# Altium PCB PCB.PcbDoc (part 1 of 2)
Units mm, origin at the board's own origin, x right, y up, seen from the top; angles counter-clockwise.
Board outline 21 x 43 mm, 2 copper layers (Top Layer, Bottom Layer), stack 1.671 mm thick; 34 components, 43 nets, 166 pads, 90 vias.
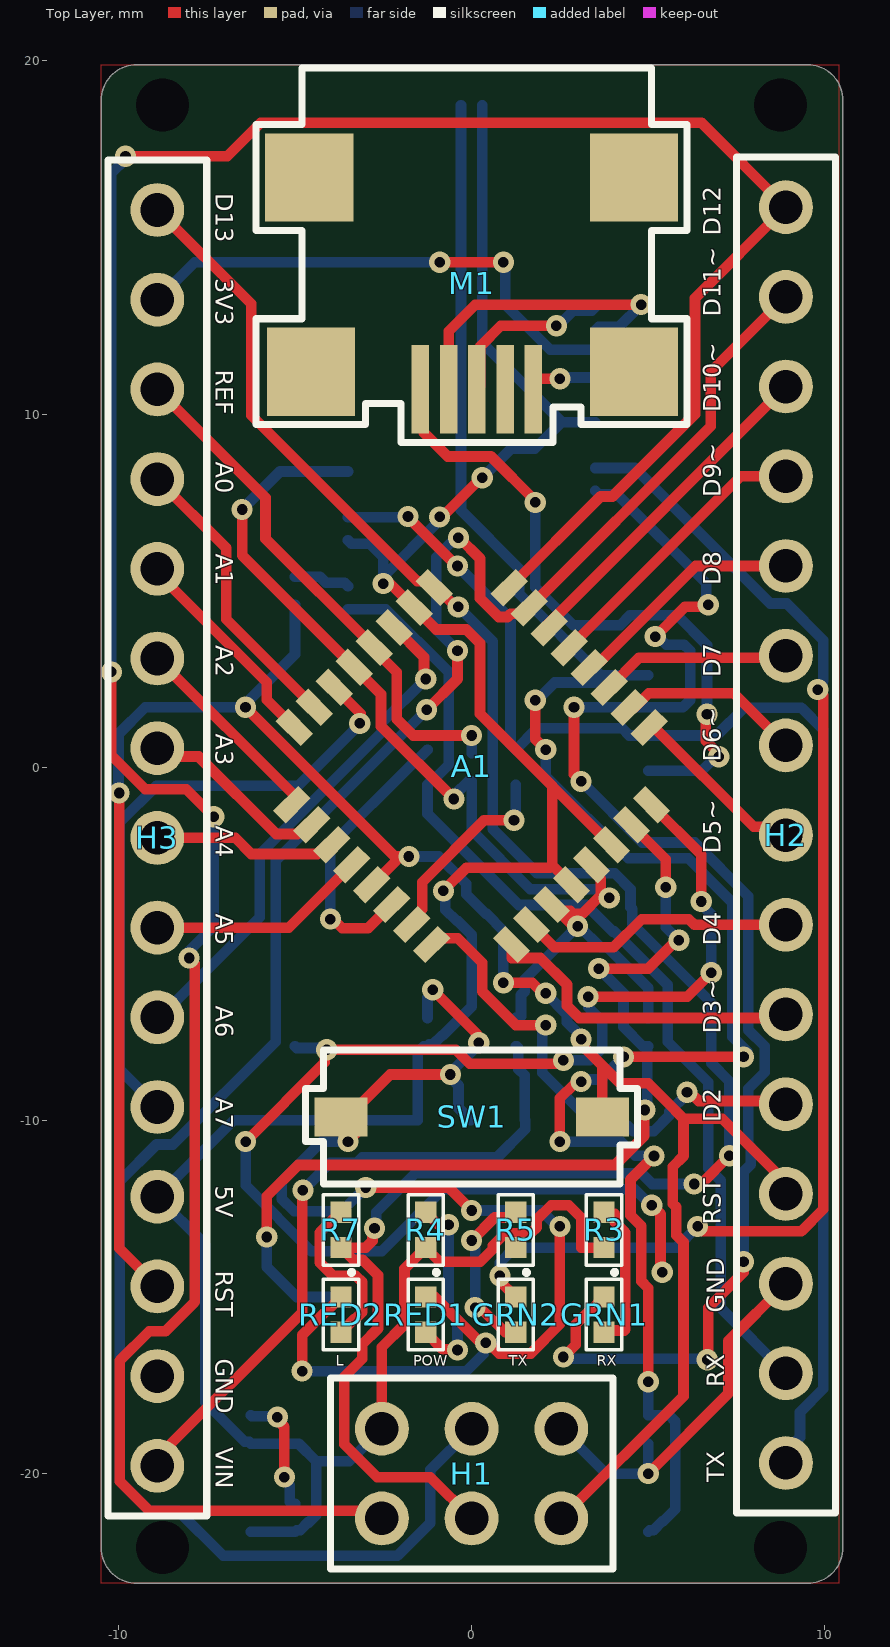
[diagram p0: Top Layer view]
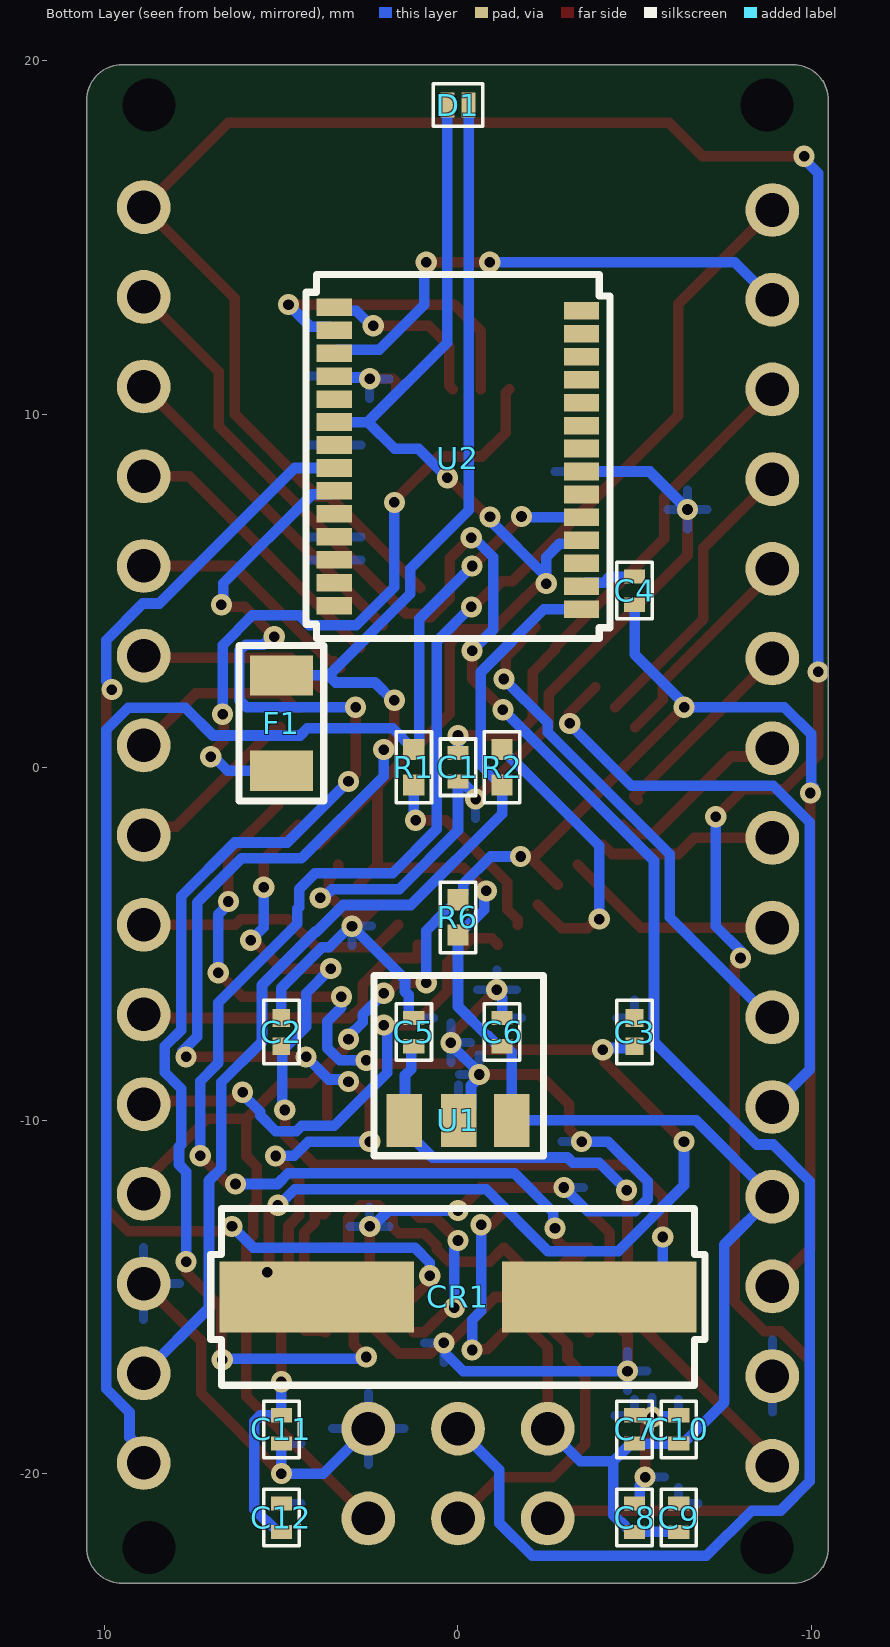
[diagram p1: Bottom Layer view, seen from below]
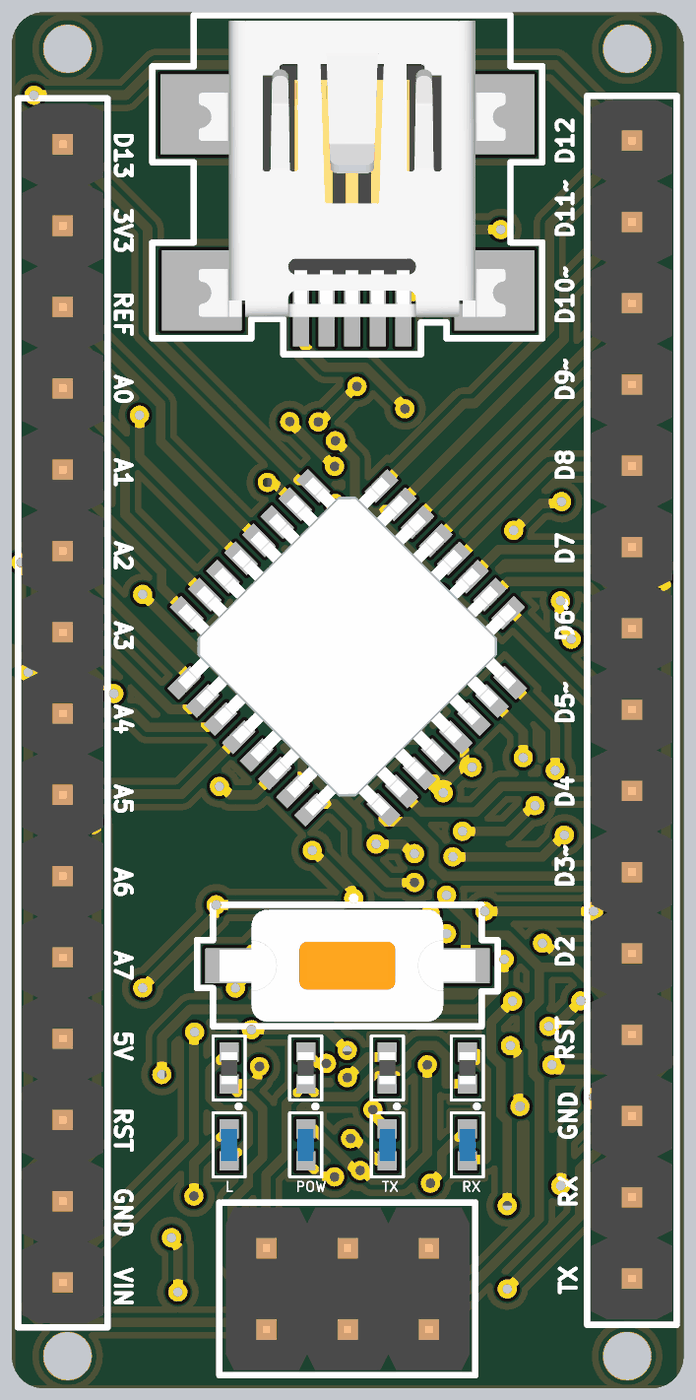
[diagram p2: 3D render of the assembled board from above, using the file's embedded part models]
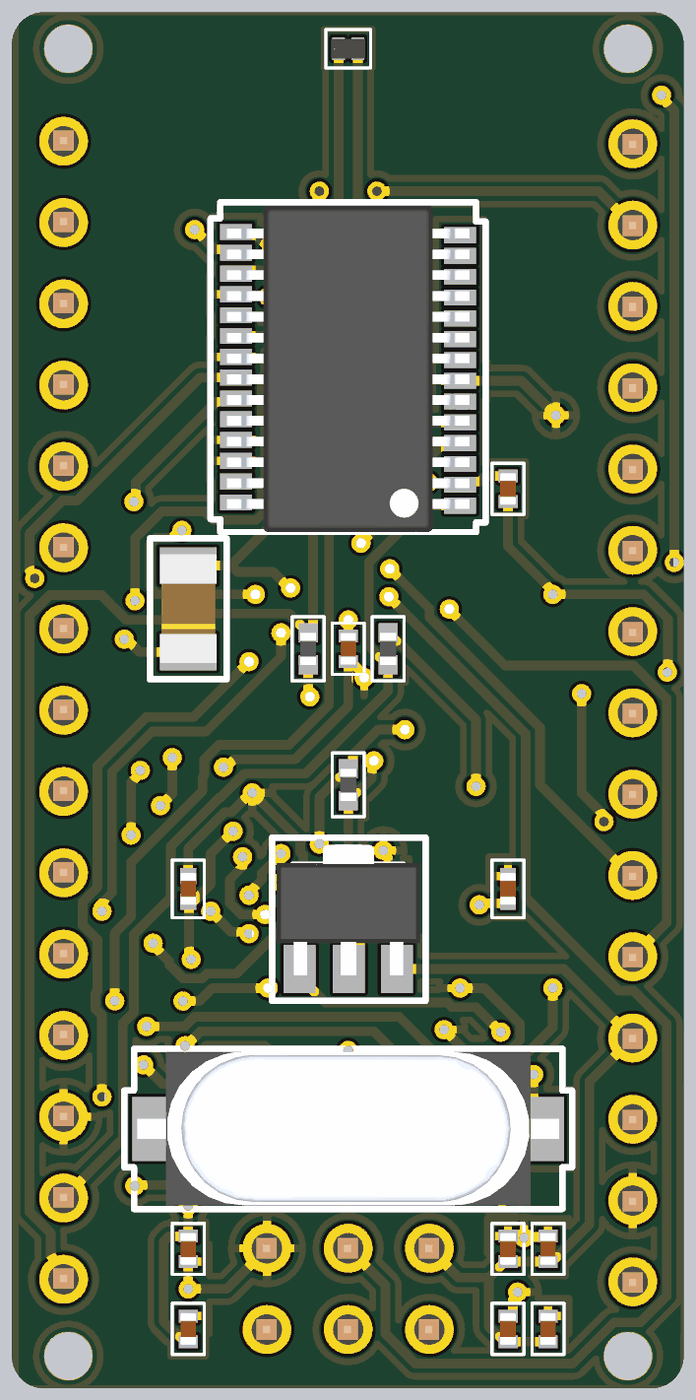
[diagram p3: 3D render of the assembled board from below, using the file's embedded part models]

## Layer stack, top to bottom
Top Solder: solder mask 0.0102, Solder Resist, Dk 3.5
Top Layer: signal copper 0.0356
Dielectric 1: dielectric 1.6, FR-4, Dk 4.8
Bottom Layer: signal copper 0.0356
Bottom Solder: solder mask 0.0102, Solder Resist, Dk 3.5

## Board outline
-10.487,-22.107 -10.487,18.893 cw(c-9.487,18.893) -9.487,19.893 9.513,19.893 cw(c9.513,18.893) 10.513,18.893 10.513,-22.107 cw(c9.513,-22.107) 9.513,-23.107 -9.487,-23.107 cw(c-9.487,-22.107)

## Design rules (kind name [scope] priority, off if disabled: settings)
Clearance [All] p1: gap=0.15 ignorepadtopadclearanceinfootprint=FALSE
HoleSize [All] p1: absolutevalues=TRUE maxlimit=2.54 minlimit=0 maxpercent=80.000 minpercent=20.000
HoleToHoleClearance [All] p1: gap=0.01 allowstackedmicrovias=TRUE
MinimumSolderMaskSliver [All] p1: minsoldermaskwidth=0.01
PolygonConnect [All] p1: connectstyle=Relief reliefconductorwidth=0.254 reliefentries=4 polygonreliefangle="90 Angle" airgapwidth=0.254
RoutingVias [All] p1: holewidth=0.3 width=0.6 viastyle="Through Hole" minholewidth=0.3 minwidth=0.6 maxholewidth=0.3 maxwidth=0.6
SilkToSilkClearance [All] p1: silktosilkclearance=0.01
SilkToSolderMaskClearance [IsPad] p1: minsilkscreentomaskgap=0 clearancetoexposedcopper=TRUE
SolderMaskExpansion [All] p1: expansion=0.102 istentingtop=FALSE
Width [All] p1: maxlimit=0.4 minlimit=0.2 preferedwidth=0.3
25 further rules are at their usual default settings.

## Components (designator, comment, footprint, x,y, rotation, side; value= is the part's Value field where it differs from the comment)
A1 "ATMega 328P" "ATMEGA 328P" 0,0 r135 top
C1 "0.1uF" "0.1UF CAPACITOR" 0,0 r270 bottom
C2 "22pF" 22PF 5,-7.5 r270 bottom
C3 "22pF" 22PF -5,-7.5 r90 bottom
C4 "0.1uF" "0.1UF CAPACITOR" -5,5 r90 bottom
C5 "0.33uF" "0.33UF CAPACITOR" 1.25,-7.5 r270 bottom
C6 "0.1uF" "0.1UF CAPACITOR" -1.25,-7.5 r270 bottom
C7 "0.1uF" "0.1UF CAPACITOR" -5,-18.75 r90 bottom
C8 "1uF" "1UF CAPACITOR" -5,-21.25 r270 bottom
C9 "4.7uF" "4.7UF CAPACITOR" -6.25,-21.25 r270 bottom
C10 "1uF" "1UF CAPACITOR" -6.25,-18.75 r270 bottom
C11 "4.7uF" "4.7UF CAPACITOR" 5,-18.75 r90 bottom
C12 "0.1uF" "0.1UF CAPACITOR" 5,-21.25 r270 bottom
CR1 "16MHz Crystal" "16MHZ CRYSTAL" 0,-15 r0 bottom
D1 "Diode" DIODE 0,18.75 r180 bottom
F1 "500mA" FUSE 5,1.25 r90 bottom
GRN1 "GREEN LED" "GREEN LED" 3.75,-15.5 r270 top
GRN2 "GREEN LED" "GREEN LED" 1.25,-15.5 r270 top
H1 "3x3" "3X3 HEADER" 0,-20 r90 top
H2 "15x1" "15X1 HEADER" 8.9,-1.92 r180 top
H3 "15x1" "15X1 HEADER" -8.9,-2 r0 top
M1 "Mini USB" "MINI USB" 0,13.7 r0 top
R1 "1K" "1K RESISTOR" 1.25,0 r90 bottom
R2 "1K" "1K RESISTOR" -1.25,0 r90 bottom
R3 "1K" "1K RESISTOR" 3.75,-13.1 r270 top
R4 "1K" "1K RESISTOR" -1.3,-13.1 r270 top
R5 "1K" "1K RESISTOR" 1.25,-13.1 r90 top
R6 "1K" "1K RESISTOR" 0,-4.25 r270 bottom
R7 "1K" "1K RESISTOR" -3.7,-13.1 r270 top
RED1 "RED LED" "RED LED" -1.3,-15.5 r270 top
RED2 "RED LED" "RED LED" -3.7,-15.5 r270 top
SW1 "Push Button" "PUSH BUTTON" 0,-9.9 r0 top
U1 "5V Voltage Regulator" "VOLTAGE REGULATOR" 0,-10 r180 bottom
U2 "FT232RL-REEL" FTDI 0,8.75 r0 bottom

## Footprints (in the part's own frame and the unit in brackets; to place one, negate y for a bottom-side part, rotate by r counter-clockwise, add the part's x,y. Pads: shape width x height; smd on the part's side, far side on the other; paste and mask are expansions set on the pad)
"0.1UF CAPACITOR" [mm]
  rect 0.4x0.6 smd: 1(-0.4,0) 2(0.4,0)
  silkscreen extent -0.8,-0.5 0.8,0.5, body extent -0.5,-0.25 0.5,0.25, height 0.55
"0.33UF CAPACITOR" [mm]
  rect 0.4x0.6 smd: 1(-0.4,0) 2(0.4,0)
  silkscreen extent -0.8,-0.5 0.8,0.5, body extent -0.5,-0.25 0.5,0.25, height 0.55
"1K RESISTOR" [mm]
  rect 0.6x0.6 smd: 1(-0.5,0) 2(0.5,0)
  silkscreen extent -1,-0.5 1,0.5, body extent -0.5,-0.25 0.5,0.25, height 0.36
"1UF CAPACITOR" [mm]
  rect 0.4x0.6 smd: 1(-0.4,0) 2(0.4,0)
  silkscreen extent -0.8,-0.5 0.8,0.5, body extent -0.5,-0.25 0.5,0.25, height 0.55
"3X3 HEADER" [mil]
  round 60 hole 37.4: 1(-50,100) 2(50,100) 3(-50,0) 4(50,0) 5(-50,-100) 6(50,-100)
  silkscreen extent -106,-157 106,157, body extent -100,-150 100,150, height 219
"4.7UF CAPACITOR" [mm]
  rect 0.4x0.6 smd: 1(-0.4,0) 2(0.4,0)
  silkscreen extent -0.8,-0.5 0.8,0.5, body extent -0.5,-0.25 0.5,0.25, height 0.55
"15X1 HEADER" [mil]
  round 60 hole 37.4: 1(0,700) 2(0,600) 3(0,500) 4(0,400) 5(0,300) 6(0,200) 7(0,100) 8(0,0) 9(0,-100) 10(0,-200) 11(0,-300) 12(0,-400) 13(0,-500) 14(0,-600) 15(0,-700)
  silkscreen extent -55,-756 55,756, body extent -50,-751 50,749, height 219
"16MHZ CRYSTAL" [mm]
  rect 5.5x2 smd: 1(-4,0) 2(4,0)
  silkscreen extent -7,-2.5 7,2.5, body extent -6.6,-2.41 6.6,2.39, height 4.31
22PF [mm]
  rect 0.5x0.5 smd: 1(-0.4,0) 2(0.4,0)
  silkscreen extent -0.9,-0.5 0.9,0.5, body extent -0.5,-0.25 0.5,0.25, height 0.56
"ATMEGA 328P" [mm]
  rect 1x0.5 smd: 1(-4.35,2.75) 2(-4.35,1.95) 3(-4.35,1.15) 4(-4.35,0.35) 5(-4.35,-0.45) 6(-4.35,-1.25) 7(-4.35,-2.05) 8(-4.35,-2.85) 17(4.35,-2.85) 18(4.35,-2.05) 19(4.35,-1.25) 20(4.35,-0.45) 21(4.35,0.35) 22(4.35,1.15) 23(4.35,1.95) 24(4.35,2.75)
  rect 0.5x1 smd: 9(-2.76,-4.35) 10(-1.96,-4.35) 11(-1.16,-4.35) 12(-0.36,-4.35) 13(0.44,-4.35) 14(1.24,-4.35) 15(2.04,-4.35) 16(2.84,-4.35) 25(2.85,4.35) 26(2.05,4.35) 27(1.25,4.35) 28(0.45,4.35) 29(-0.35,4.35) 30(-1.15,4.35) 31(-1.95,4.35) 32(-2.75,4.35)
  body extent -4.45,-4.55 4.55,4.45, height 1.06
DIODE [mm]
  rect 0.4x0.7 smd: 1(-0.3,0) 2(0.3,0)
  silkscreen extent -0.7,-0.6 0.7,0.6, body extent -0.53,-0.31 0.53,0.3, height 0.54
FTDI [mm]
  rect 1x0.5 smd: 1(-3.5,4.275) 2(-3.5,3.625) 3(-3.5,2.975) 4(-3.5,2.325) 5(-3.5,1.675) 6(-3.5,1.025) 7(-3.5,0.375) 8(-3.5,-0.275) 9(-3.5,-0.925) 10(-3.5,-1.575) 11(-3.5,-2.225) 12(-3.5,-2.875) 13(-3.5,-3.525) 14(-3.5,-4.175) 15(3.5,-4.275) 16(3.5,-3.625) 17(3.5,-2.975) 18(3.5,-2.325) 19(3.5,-1.675) 20(3.5,-1.025) 21(3.5,-0.375) 22(3.5,0.275) 23(3.5,0.925) 24(3.5,1.575) 25(3.5,2.225) 26(3.5,2.875) 27(3.5,3.525) 28(3.5,4.175)
  silkscreen extent -4.3,-5.2 4.3,5.1, body extent -3.9,-5.1 3.9,5.1, height 1.86
FUSE [mm]
  rect 1.14x1.78 smd: 1(-1.35,0) 2(1.35,0)
  silkscreen extent -2.2,-1.2 2.2,1.2, body extent -1.7,-0.89 1.7,0.89, height 0.79
"GREEN LED" [mm]
  rect 0.6x0.6 smd: 1(-0.5,0) 2(0.5,0)
  silkscreen extent -1.2,-0.5 1,0.5, body extent -0.5,-0.25 0.5,0.25, height 0.41
"MINI USB" [mm]
  rect 0.5x2.5 smd: 1(-1.45,-3) 2(-0.65,-3) 3(0.15,-3) 4(0.95,-3) 5(1.75,-3)
  rect 2.5x2.5 smd: 6(-4.6,3) 6(-4.55,-2.5) 7(4.6,-2.5) 8(4.6,3)
  silkscreen extent -6.1,-4.5 6.1,6.1, body extent -4.65,-3.32 4.95,5.92, height 3.91
"PUSH BUTTON" [mm]
  rect 1.5x1.1 smd: 1(-3.7,0) 2(3.7,0)
  silkscreen extent -4.7,-1.9 4.7,1.9, body extent -4,-1.75 4,1.75, height 4.16
"RED LED" [mm]
  rect 0.6x0.6 smd: 1(-0.5,0) 2(0.5,0)
  silkscreen extent -1.2,-0.5 1,0.5, body extent -0.5,-0.25 0.5,0.25, height 0.41
"VOLTAGE REGULATOR" [mm]
  rect 1x1.5 smd: 1(-1.52,0) 2(0.02,0) 3(1.52,0)
  silkscreen extent -2.38,-1 2.42,4.1, body extent -2.24,-0.2 2.26,3.9, height 1.61

## Part data
A1: library part ATMEGA328P-AUR, "ATMEL         ATMEGA328P-AUR             8 Bit Microcontroller, Low Power High Performance, ATmega, 20 MHz, 32 KB, 2 KB, 32 Pins, TQFP", Case/Package=A, Frequency=20MHz, Manufacturer="Microchip / Atmel", Max Operating Temperature=85°C, Max Supply Voltage=5.5V, Min Operating Temperature=-40°C, Min Supply Voltage=1.8V, Package Quantity=2000, Supplier Part Number 1=ATMEGA328P-AURCT-ND, Category=Microcontrollers, ComponentLink1Description=https://datasheet.ciiva.com/6641/atmega48a-pa-88a-pa-168a-pa-328-p-ds-ds40002061a-6641009.pdf?src-supplier=Digi-Key, ComponentLink1URL=https://datasheet.ciiva.com/6641/atmega48a-pa-88a-pa-168a-pa-328-p-ds-ds40002061a-6641009.pdf?src-supplier=Digi-Key, Contact Plating=Tin,Matte, Core Architecture=AVR, Data Bus Width=8b, Interface=I2C,SPI,UART,USART, Lead Free="Lead Free", Manufacturer Part Number=ATMEGA328P-AUR, Max Frequency=20MHz, Memory Size=32KB, Memory Type=FLASH, Mount="Surface Mount", Number of I/Os=23, Number of Pins=32, Number of Programmable I/O=23, Number of Timers/Counters=3, Oscillator Type=Internal, Packaging="Tape and Reel", Peripherals="Brown-out Detect/Reset,POR,PWM,WDT", Pricing 1="1=2.08000, 25=1.91000, 100=1.73000 (USD)", RAM Size=2KB, REACH SVHC="No SVHC", RoHS=Yes, Stock 1=15541, Supplier 1=Digi-Key, Watchdog Timer=Yes
C1 C4 C6 C7 C12: library part EMK105BJ104KV-F, "TAIYO YUDEN - EMK105BJ104KV-F - CERAMIC CAPACITOR, 0.1UF, 16V, X5R, 10%, 0402, FULL REEL", Capacitance=100nF, Case Code (Imperial)=0402, Case Code (Metric)=1005, Dielectric=X5R, Manufacturer="Taiyo Yuden", Max Operating Temperature=85°C, Min Operating Temperature=-55°C, Package Quantity=1, Resistor Type=Ceramic, Supplier Part Number 1=587-1226-1-ND, Tolerance=10%, Voltage Rating=16V, Case/Package=0402, Category="Ceramic Capacitors", ComponentLink1Description=https://datasheet.ciiva.com/30156/744emk105bj104kv-f-30156673.pdf?src-supplier=Onlinecomponents.com, ComponentLink1URL=https://datasheet.ciiva.com/30156/744emk105bj104kv-f-30156673.pdf?src-supplier=Onlinecomponents.com, ComponentLink2Description=https://datasheet.ciiva.com/30119/255emk105bj104kv-f-30119734.pdf?src-supplier=Onlinecomponents.com, ComponentLink2URL=https://datasheet.ciiva.com/30119/255emk105bj104kv-f-30119734.pdf?src-supplier=Onlinecomponents.com, ComponentLink3Description=https://datasheet.ciiva.com/129/emk105bj104kv-f-ss-129786.pdf?src-supplier=Digi-Key, ComponentLink3URL=https://datasheet.ciiva.com/129/emk105bj104kv-f-ss-129786.pdf?src-supplier=Digi-Key, ComponentLink4Description=https://datasheet.ciiva.com/15920/1135emk105bj104kv-f-15920444.pdf?src-supplier=Onlinecomponents.com, ComponentLink4URL=https://datasheet.ciiva.com/15920/1135emk105bj104kv-f-15920444.pdf?src-supplier=Onlinecomponents.com, ComponentLink5Description=https://datasheet.ciiva.com/5443/mlcc-all-e-541559-5443819.pdf?src-supplier=Mouser, ComponentLink5URL=https://datasheet.ciiva.com/5443/mlcc-all-e-541559-5443819.pdf?src-supplier=Mouser, Contact Plating=Tin, Depth=0.5mm, Halogen Free="Halogen Free", Height=0.5mm, Lead Free="Lead Free", Length=1mm, Manufacturer Part Number=EMK105BJ104KV-F, Mount="Surface Mount", Number of Pins=2, Packaging="Tape and Reel", Pricing 1="1=0.10000, 10=0.02100, 50=0.01120, 100=0.00920, 500=0.00654, 1000=0.00514, 2500=0.00468, 5000=0.00430 (USD)", Radiation Hardening=No, REACH SVHC=Unknown, RoHS=Yes, Stock 1=2015960, Supplier 1=Digi-Key, Termination=SMD/SMT, Thickness=0.022inch, Voltage Rating (DC)=16V, Width=0.02inch
C2 C3: library part 04025A220FAT2A, "Cap Ceramic 22pF 50V C0G 1% SMD 0402 125C Paper T/R", Case Code (Imperial)=0402, Case Code (Metric)=1005, Dielectric=C0G, Manufacturer="Kyocera AVX", Max Operating Temperature=125°C, Min Operating Temperature=-55°C, Package Quantity=1, Supplier Part Number 1=478-5765-1-ND, Tolerance=1%, Voltage Rating=50V, Capacitance=22pF, Case/Package=0402, Category="Ceramic Capacitors", ComponentLink1Description=https://datasheet.ciiva.com/153/ccog-153298.pdf?src-supplier=Digi-Key, ComponentLink1URL=https://datasheet.ciiva.com/153/ccog-153298.pdf?src-supplier=Digi-Key, ComponentLink2Description=https://datasheet.ciiva.com/153/ccog-153299.pdf?src-supplier=Digi-Key, ComponentLink2URL=https://datasheet.ciiva.com/153/ccog-153299.pdf?src-supplier=Digi-Key, ComponentLink3Description=https://datasheet.ciiva.com/153/ccog-153300.pdf?src-supplier=Digi-Key, ComponentLink3URL=https://datasheet.ciiva.com/153/ccog-153300.pdf?src-supplier=Digi-Key, ComponentLink4Description=https://datasheet.ciiva.com/11530/ccog-11530021.pdf?src-supplier=Avnet, ComponentLink4URL=https://datasheet.ciiva.com/11530/ccog-11530021.pdf?src-supplier=Avnet, ComponentLink5Description=https://datasheet.ciiva.com/5419/ccog-243403-5419529.pdf?src-supplier=Mouser, ComponentLink5URL=https://datasheet.ciiva.com/5419/ccog-243403-5419529.pdf?src-supplier=Mouser, Contact Plating=Tin,Matte, Depth=0.5mm, Height=0.56mm, Lead Free="Lead Free", Length=1mm, Manufacturer Part Number=04025A220FAT2A, Mount="Surface Mount", Packaging="Tape and Reel", Pricing 1="1=0.51000, 10=0.36100, 50=0.27280, 100=0.23760, 500=0.17600, 1000=0.14960, 2500=0.14080, 5000=0.13200 (USD)", Radiation Hardening=No, REACH SVHC=Unknown, RoHS=Yes, Stock 1=43003, Supplier 1=Digi-Key, Termination=SMD/SMT, Thickness=0.022inch, Voltage Rating (DC)=50V, Width=0.02inch
C5: library part CGA2B1X7S1C334K050BC, "Automotive Grade", Capacitance=330nF, Case Code (Imperial)=0402, Case Code (Metric)=1005, Dielectric=X7S, Manufacturer=TDK, Max Operating Temperature=125°C, Min Operating Temperature=-55°C, Package Quantity=10000, Ratings=AEC-Q200, Supplier Part Number 1=445-180203-1-ND, Tolerance=10%, Voltage Rating=16V, Case/Package=0402, Category="Ceramic Capacitors", ComponentLink1Description=https://product.tdk.com/info/en/catalog/datasheets/mlcc_automotive_general_en.pdf?src-supplier=Digi-Key, ComponentLink1URL=https://product.tdk.com/info/en/catalog/datasheets/mlcc_automotive_general_en.pdf?src-supplier=Digi-Key, ComponentLink2Description=https://product.tdk.com/info/en/catalog/spec/mlccspec_automotive_general_midvoltage_en.pdf?src-supplier=Digi-Key, ComponentLink2URL=https://product.tdk.com/info/en/catalog/spec/mlccspec_automotive_general_midvoltage_en.pdf?src-supplier=Digi-Key, ComponentLink3Description=http://product.tdk.com/capacitor/mlcc/class/print_detail_pdf.php?lang=en&part_no=CGA2B1X7S1C334K050BC&src-supplier=Avnet, ComponentLink3URL=http://product.tdk.com/capacitor/mlcc/class/print_detail_pdf.php?lang=en&part_no=CGA2B1X7S1C334K050BC&src-supplier=Avnet, ComponentLink4Description=http://product.tdk.com/capacitor/mlcc/detailed_information.php?lang=en&ref=jp&part_no=CGA2B1X7S1C334K050BC&src-supplier=Mouser, ComponentLink4URL=http://product.tdk.com/capacitor/mlcc/detailed_information.php?lang=en&ref=jp&part_no=CGA2B1X7S1C334K050BC&src-supplier=Mouser, Height=0.5mm, Length=0.039inch, Manufacturer Part Number=CGA2B1X7S1C334K050BC, Mount="Surface Mount", Packaging="Tape and Reel", Pricing 1="1=0.23000, 10=0.15800, 50=0.09460, 100=0.07980, 500=0.05460, 1000=0.04830, 2500=0.04620, 5000=0.04200 (USD)", RoHS=Yes, Stock 1=26015, Supplier 1=Digi-Key, Termination=SMD/SMT, Thickness=0.022inch, Voltage Rating (DC)=16V, Weight=2.3E-05oz, Width=0.02inch
C8 C10: library part LMK105BJ105KV-F, "LMK105BJ105KV-F", Case Code (Imperial)=0402, Case Code (Metric)=1005, Dielectric=X5R, Manufacturer="Taiyo Yuden", Max Operating Temperature=85°C, Min Operating Temperature=-55°C, Package Quantity=1, Resistor Type=Ceramic, Supplier Part Number 1=587-1454-1-ND, Tolerance=10%, Voltage Rating=10V, Capacitance=1uF, Case/Package=0402, Category="Ceramic Capacitors", ComponentLink1Description=https://datasheet.ciiva.com/26872/getdatasheetpartid-637441-26872608.pdf?src-supplier=Verical, ComponentLink1URL=https://datasheet.ciiva.com/26872/getdatasheetpartid-637441-26872608.pdf?src-supplier=Verical, ComponentLink2Description=https://datasheet.ciiva.com/15921/463lmk105bj105kv-f-15921218.pdf?src-supplier=Onlinecomponents.com, ComponentLink2URL=https://datasheet.ciiva.com/15921/463lmk105bj105kv-f-15921218.pdf?src-supplier=Onlinecomponents.com, ComponentLink3Description=https://datasheet.ciiva.com/131/lmk105bj105kv-f-ss-131735.pdf?src-supplier=Digi-Key, ComponentLink3URL=https://datasheet.ciiva.com/131/lmk105bj105kv-f-ss-131735.pdf?src-supplier=Digi-Key, ComponentLink4Description=https://datasheet.ciiva.com/30256/308lmk105bj105kv-f-30256903.pdf?src-supplier=Onlinecomponents.com, ComponentLink4URL=https://datasheet.ciiva.com/30256/308lmk105bj105kv-f-30256903.pdf?src-supplier=Onlinecomponents.com, Depth=0.5mm, Halogen Free="Halogen Free", Height=0.5mm, Lead Free="Lead Free", Length=1mm, Manufacturer Part Number=LMK105BJ105KV-F, Mount="Surface Mount", Packaging="Tape and Reel", Pricing 1="1=0.11000, 10=0.07900, 50=0.04300, 100=0.03500, 500=0.02502, 1000=0.01966, 2500=0.01788, 5000=0.01645 (USD)", Radiation Hardening=No, REACH SVHC=Unknown, RoHS=Yes, Stock 1=3118229, Supplier 1=Digi-Key, Termination=SMD/SMT, Thickness=0.022inch, Voltage Rating (DC)=10V, Width=0.5mm
C9 C11: library part JMK105BBJ475MVHF, "CAP CER 4.7UF 6.3V X5R 0402", Case Code (Imperial)=0402, Case Code (Metric)=1005, Dielectric=X5R, Manufacturer="Taiyo Yuden", Max Operating Temperature=85°C, Min Operating Temperature=-55°C, Package Quantity=10000, Ratings=AEC-Q200, Supplier Part Number 1=587-3711-1-ND, Tolerance=20%, Voltage Rating=6.3V, Capacitance=4.7uF, Case/Package=0402, Category="Ceramic Capacitors", ComponentLink1Description=http://www.farnell.com/datasheets/2819875.pdf?src-supplier=Farnell, ComponentLink1URL=http://www.farnell.com/datasheets/2819875.pdf?src-supplier=Farnell, ComponentLink2Description=http://www.mouser.com/ds/2/396/mlcc11_hq_e-541564.pdf?src-supplier=Mouser, ComponentLink2URL=http://www.mouser.com/ds/2/396/mlcc11_hq_e-541564.pdf?src-supplier=Mouser, ComponentLink3Description=http://www.yuden.co.jp/ut/product/category/capacitor/putpdf/JMK105BBJ475MVHF_SS.pdf?src-supplier=Avnet, ComponentLink3URL=http://www.yuden.co.jp/ut/product/category/capacitor/putpdf/JMK105BBJ475MVHF_SS.pdf?src-supplier=Avnet, ComponentLink4Description=http://www.farnell.com/datasheets/2819875.pdf?src-supplier=Newark, ComponentLink4URL=http://www.farnell.com/datasheets/2819875.pdf?src-supplier=Newark, ComponentLink5Description=http://www.farnell.com/datasheets/2819875.pdf?src-supplier=Element14, ComponentLink5URL=http://www.farnell.com/datasheets/2819875.pdf?src-supplier=Element14, ComponentLink6Description=http://www.yuden.co.jp/productdata/catalog/en/mlcc_all_e.pdf?src-supplier=Avnet+Asia, ComponentLink6URL=http://www.yuden.co.jp/productdata/catalog/en/mlcc_all_e.pdf?src-supplier=Avnet+Asia, ComponentLink7Description=http://www.yuden.co.jp/productdata/catalog/en/mlcc_all_hq_e.pdf?src-supplier=Digi-Key, ComponentLink7URL=http://www.yuden.co.jp/productdata/catalog/en/mlcc_all_hq_e.pdf?src-supplier=Digi-Key, ComponentLink8Description=http://ds.yuden.co.jp/TYCOMPAS/ut/detail.do?productNo=JMK105BBJ475MVHF&fileName=JMK105BBJ475MVHF_SS&mode=specSheetDownload&src-supplier=Digi-Key, ComponentLink8URL=http://ds.yuden.co.jp/TYCOMPAS/ut/detail.do?productNo=JMK105BBJ475MVHF&fileName=JMK105BBJ475MVHF_SS&mode=specSheetDownload&src-supplier=Digi-Key, Contact Plating=Tin, Halogen Free="Halogen Free", Height=0.5mm, Lead Free="Lead Free", Length=1mm, Manufacturer Part Number=JMK105BBJ475MVHF, Mount="Surface Mount", Packaging="Tape and Reel", Pricing 1="1=0.18000, 10=0.12700, 50=0.07220, 100=0.05980, 500=0.04194, 1000=0.03472, 2500=0.03231, 5000=0.02956 (USD)", RoHS=Yes, Stock 1=77436, Supplier 1=Digi-Key, Termination=SMD/SMT, Thickness=0.026inch, Voltage Rating (DC)=6.3V, Weight=2.3E-05oz, Width=0.5mm
CR1: library part ECS-160-20-5PX-TR, "CRYSTAL 16.0000MHZ 20PF SMD", ESR (Equivalent Series Resistance)=40R, Frequency=16MHz, Frequency Stability=50ppm, Frequency Tolerance=30ppm, Load Capacitance=20pF, Manufacturer="ECS International", Max Operating Temperature=70°C, Min Operating Temperature=-10°C, Package Quantity=1000, Supplier Part Number 1=XC1282CT-ND, Category=Crystals, ComponentLink1Description=https://datasheet.ciiva.com/852/csm-7x-852386.pdf?src-supplier=Digi-Key, ComponentLink1URL=https://datasheet.ciiva.com/852/csm-7x-852386.pdf?src-supplier=Digi-Key, ComponentLink2Description=https://datasheet.ciiva.com/852/csm-7x-852388.pdf?src-supplier=Digi-Key, ComponentLink2URL=https://datasheet.ciiva.com/852/csm-7x-852388.pdf?src-supplier=Digi-Key, ComponentLink3Description=https://datasheet.ciiva.com/852/csm-7x-852387.pdf?src-supplier=Digi-Key, ComponentLink3URL=https://datasheet.ciiva.com/852/csm-7x-852387.pdf?src-supplier=Digi-Key, Height=0.169inch, Lead Free="Lead Free", Length=0.449inch, Manufacturer Part Number=ECS-160-20-5PX-TR, Mount="Surface Mount", Number of Pins=2, Packaging="Tape and Reel", Pricing 1="1=0.45000, 10=0.37500, 50=0.33760, 100=0.30000, 500=0.28500 (USD)", RoHS=Yes, Stock 1=15488, Supplier 1=Digi-Key, Termination=SMD/SMT, Tolerance=30ppm, Width=0.189inch
D1: library part BAT54LP-7, "MULTICOMP PRO - BAT54LP-7 - DIODE, ULTRAFAST RECOVERY, 100mA, 30V, DFN1006", Average Rectified Current=200mA, Capacitance=10pF, Case/Package=DFN, Forward Voltage=1V, Manufacturer=Diodes, Max Forward Surge Current (Ifsm)=600mA, Max Operating Temperature=125°C, Max Repetitive Reverse Voltage (Vrrm)=30V, Max Reverse Current=2uA, Min Operating Temperature=-65°C, Package Quantity=3000, Power Dissipation=250mW, Supplier Part Number 1=BAT54LPDICT-ND, Category="Schottky Diodes", ComponentLink1Description=https://datasheet.ciiva.com/16210/ds30504-16210561.pdf?src-supplier=Future+Electronics, ComponentLink1URL=https://datasheet.ciiva.com/16210/ds30504-16210561.pdf?src-supplier=Future+Electronics, ComponentLink2Description=https://datasheet.ciiva.com/4715/ds30504-85267-4715512.pdf?src-supplier=Mouser, ComponentLink2URL=https://datasheet.ciiva.com/4715/ds30504-85267-4715512.pdf?src-supplier=Mouser, ComponentLink3Description=https://datasheet.ciiva.com/15144/getdatasheetpartid-39647-15144085.pdf?src-supplier=Verical, ComponentLink3URL=https://datasheet.ciiva.com/15144/getdatasheetpartid-39647-15144085.pdf?src-supplier=Verical, ComponentLink4Description=https://datasheet.ciiva.com/8303/ds30504-8303286.pdf?src-supplier=Avnet, ComponentLink4URL=https://datasheet.ciiva.com/8303/ds30504-8303286.pdf?src-supplier=Avnet, ComponentLink5Description=https://datasheet.ciiva.com/8300/ds30504-8300695.pdf?src-supplier=Avnet, ComponentLink5URL=https://datasheet.ciiva.com/8300/ds30504-8300695.pdf?src-supplier=Avnet, ComponentLink6Description=https://datasheet.ciiva.com/22695/1915672-22695255.pdf?src-supplier=Element14, ComponentLink6URL=https://datasheet.ciiva.com/22695/1915672-22695255.pdf?src-supplier=Element14, ComponentLink7Description=https://datasheet.ciiva.com/913/ds30504-913080.pdf?src-supplier=Digi-Key, ComponentLink7URL=https://datasheet.ciiva.com/913/ds30504-913080.pdf?src-supplier=Digi-Key, ComponentLink8Description=https://datasheet.ciiva.com/913/ds30504-913081.pdf?src-supplier=Digi-Key, ComponentLink8URL=https://datasheet.ciiva.com/913/ds30504-913081.pdf?src-supplier=Digi-Key, ComponentLink9Description=https://datasheet.ciiva.com/913/ds30504-913082.pdf?src-supplier=Digi-Key, ComponentLink9URL=https://datasheet.ciiva.com/913/ds30504-913082.pdf?src-supplier=Digi-Key, ComponentLink10Description=https://datasheet.ciiva.com/1180/ds30504-1180298.pdf?src-supplier=Element14, ComponentLink10URL=https://datasheet.ciiva.com/1180/ds30504-1180298.pdf?src-supplier=Element14, ComponentLink11Description=https://datasheet.ciiva.com/25947/ds30504-25947226.pdf?src-supplier=Avnet+Europe, ComponentLink11URL=https://datasheet.ciiva.com/25947/ds30504-25947226.pdf?src-supplier=Avnet+Europe, Contact Plating=Gold, Current Rating=200mA, Element Configuration=Single, Forward Current=200mA, Height=0.47mm, Lead Free="Lead Free", Length=1mm, Manufacturer Part Number=BAT54LP-7, Max Reverse Voltage (DC)=30V, Mount="Surface Mount", Number of Pins=2, Output Current=200mA, Packaging="Tape and Reel", Peak Non-Repetitive Surge Current=600mA, Polarity=Standard, Power Rating=250mW, Pricing 1="1=0.40000, 10=0.28200, 100=0.14250, 500=0.11626, 1000=0.08625 (USD)", Radiation Hardening=No, REACH SVHC="No SVHC", Reverse Recovery Time=5ns, RoHS=Yes, Stock 1=105889, Supplier 1=Digi-Key, Voltage Rating (DC)=30V, Width=0.6mm
F1: library part C1Q500, "Fuse Chip 0.5A 125V Very Fast 2-Pin Solder Pad Surface Mount T/R", Case Code (Imperial)=1206, Case Code (Metric)=3216, DC Cold Resistance=320mR, Manufacturer=Bel, Max Operating Temperature=125°C, Max Voltage Rating (DC)=63V, Min Operating Temperature=-55°C, Power Dissipation=140mW, Supplier Part Number 1=507-1075-1-ND, Voltage Rating (AC)=125V, Approvals=CSA,CE,cULus, Case/Package=1206, Category=Fuses, ComponentLink1Description=https://datasheet.ciiva.com/300/c1q-300590.pdf?src-supplier=Digi-Key, ComponentLink1URL=https://datasheet.ciiva.com/300/c1q-300590.pdf?src-supplier=Digi-Key, ComponentLink2Description=https://datasheet.ciiva.com/300/c1q-300592.pdf?src-supplier=Digi-Key, ComponentLink2URL=https://datasheet.ciiva.com/300/c1q-300592.pdf?src-supplier=Digi-Key, ComponentLink3Description=https://datasheet.ciiva.com/300/c1q-300591.pdf?src-supplier=Digi-Key, ComponentLink3URL=https://datasheet.ciiva.com/300/c1q-300591.pdf?src-supplier=Digi-Key, ComponentLink4Description=https://datasheet.ciiva.com/8264/c1q-8264015.pdf?src-supplier=Avnet, ComponentLink4URL=https://datasheet.ciiva.com/8264/c1q-8264015.pdf?src-supplier=Avnet, Current Rating=500mA, Depth=1.52mm, Fuse Type="Board Mount (Cartridge Style Excluded)", Height=0.023inch, Housing Material=Ceramic, Lead Free="Lead Free", Length=3.07mm, Manufacturer Part Number=C1Q500, Mount="Surface Mount", Number of Pins=2, Packaging="Tape and Reel", Pricing 1="1=0.28000, 5=0.27600, 10=0.26300, 50=0.23500, 100=0.21870, 250=0.19440, 500=0.16200, 1000=0.15390 (USD)", RoHS=Yes, Stock 1=93521, Supplier 1=Digi-Key, Voltage Rating (DC)=63V, Width=0.062inch
GRN1 GRN2: library part 150040VS73240, "LED GREEN CLEAR 0402 SMD", Case Code (Imperial)=0402, Case Code (Metric)=1005, Color=Green, Forward Voltage=2V, Lens Color=Colorless, Manufacturer="Wurth Electronics", Supplier Part Number 1=732-11992-1-ND, Test Current=20mA, Case/Package=0402, Category=LEDs, ComponentLink1Description=http://www.farnell.com/datasheets/2621637.pdf?src-supplier=Farnell, ComponentLink1URL=http://www.farnell.com/datasheets/2621637.pdf?src-supplier=Farnell, ComponentLink2Description=https://katalog.we-online.de/pbs/datasheet/150040VS73240.pdf?src-supplier=Digi-Key, ComponentLink2URL=https://katalog.we-online.de/pbs/datasheet/150040VS73240.pdf?src-supplier=Digi-Key, ComponentLink3Description=http://www.farnell.com/datasheets/2621637.pdf?src-supplier=Element14, ComponentLink3URL=http://www.farnell.com/datasheets/2621637.pdf?src-supplier=Element14, ComponentLink4Description=http://www.farnell.com/datasheets/2621637.pdf?src-supplier=Newark, ComponentLink4URL=http://www.farnell.com/datasheets/2621637.pdf?src-supplier=Newark, Dominant Wavelength=570nm, Height=0.5mm, Length=1mm, Lens Size=0.5mm, Lens Style=Flat, Lens Transparency=Clear, Luminous Intensity=50mcd, Manufacturer Part Number=150040VS73240, Mount="Surface Mount", Packaging="Tape and Reel", Pricing 1="1=0.30000, 10=0.25400, 100=0.22900, 500=0.20400, 1000=0.17900 (USD)", RoHS=No, Stock 1=46612, Supplier 1=Digi-Key, Viewing Angle=120°, Width=0.5mm
H1: library part 61300621121, "CONN HEADER VERT 6POS 2.54MM", Color=Black, Manufacturer="Wurth Electronics", Supplier Part Number 1=732-5295-ND, Category=Connectors, ComponentLink1Description=https://datasheet.ciiva.com/28505/1442180-28505463.pdf?src-supplier=Element14, ComponentLink1URL=https://datasheet.ciiva.com/28505/1442180-28505463.pdf?src-supplier=Element14, Connector Type="Male Pin", Contact Material=Copper, Contact Mating Length=0.236inch, Contact Plating=Gold, Gender=Male, Manufacturer Part Number=61300621121, Mount="Through Hole", Number of Contacts=6, Number of Positions=6, Number of Rows=2, Packaging=Bulk, Pitch=0.1inch, Pricing 1="1=0.54000, 10=0.45400, 25=0.37920, 50=0.31600, 100=0.28700, 1000=0.26100 (USD)", REACH SVHC=Unknown, RoHS=Yes, Row Spacing=0.1inch, Stock 1=5661, Supplier 1=Digi-Key, Termination=Solder
H2 H3: library part 61301511121, "WURTH ELEKTRONIK         61301511121            Board-To-Board Connector, Vertical, WR-PHD Series, Through Hole, Header, 15 Contacts, 2.54 mm", Color=Black, Manufacturer="Wurth Electronics", Supplier Part Number 1=732-5326-ND, Category=Connectors, ComponentLink1Description=https://katalog.we-online.de/em/datasheet/6130xx11121.pdf?src-supplier=Digi-Key, ComponentLink1URL=https://katalog.we-online.de/em/datasheet/6130xx11121.pdf?src-supplier=Digi-Key, ComponentLink2Description=http://www.farnell.com/cad/1737268.pdf?src-supplier=Element14, ComponentLink2URL=http://www.farnell.com/cad/1737268.pdf?src-supplier=Element14, Connector Type="Male Pin", Contact Material=Copper, Contact Mating Length=0.236inch, Contact Plating=Gold, Gender=Male, Manufacturer Part Number=61301511121, Mount="Through Hole", Number of Contacts=15, Number of Positions=15, Number of Rows=1, Packaging=Bulk, Pitch=0.1inch, Pricing 1="1=0.82000, 10=0.69700, 25=0.58120, 50=0.48400, 100=0.44000, 500=0.40000 (USD)", REACH SVHC=Unknown, RoHS=Yes, Stock 1=461, Supplier 1=Digi-Key, Termination=Solder
M1: library part 65100516121, "CONN RCPT USB2.0 MINI B SMD R/A", Color=Black, Contact Resistance=20mR, Current Rating=1A, Flammability Rating="UL94 V-0", Insulation Resistance=1GR, Manufacturer="Wurth Electronics", Max Operating Temperature=105°C, Min Operating Temperature=-40°C, Package Quantity=500, Supplier Part Number 1=732-2109-1-ND, Voltage Rating=30V, Category=Connectors, ComponentLink1Description=https://datasheet.ciiva.com/29660/65100516121-29660272.pdf?src-supplier=Digi-Key, ComponentLink1URL=https://datasheet.ciiva.com/29660/65100516121-29660272.pdf?src-supplier=Digi-Key, ComponentLink2Description=https://datasheet.ciiva.com/22694/1442207-22694625.pdf?src-supplier=Element14, ComponentLink2URL=https://datasheet.ciiva.com/22694/1442207-22694625.pdf?src-supplier=Element14, ComponentLink3Description=https://datasheet.ciiva.com/4598/65100516121-83749-4598775.pdf?src-supplier=Mouser, ComponentLink3URL=https://datasheet.ciiva.com/4598/65100516121-83749-4598775.pdf?src-supplier=Mouser, ComponentLink4Description=https://datasheet.ciiva.com/851/65100516121-851772.pdf?src-supplier=Digi-Key, ComponentLink4URL=https://datasheet.ciiva.com/851/65100516121-851772.pdf?src-supplier=Digi-Key, ComponentLink5Description=https://datasheet.ciiva.com/11731/0900766b81023aba-11731279.pdf?src-supplier=RSComponents, ComponentLink5URL=https://datasheet.ciiva.com/11731/0900766b81023aba-11731279.pdf?src-supplier=RSComponents, ComponentLink6Description=https://datasheet.ciiva.com/1098/1442207-1098982.pdf?src-supplier=Element14, ComponentLink6URL=https://datasheet.ciiva.com/1098/1442207-1098982.pdf?src-supplier=Element14, ComponentLink7Description=https://datasheet.ciiva.com/22652/1442207-22652217.pdf?src-supplier=Farnell, ComponentLink7URL=https://datasheet.ciiva.com/22652/1442207-22652217.pdf?src-supplier=Farnell, ComponentLink8Description=https://datasheet.ciiva.com/14103/4257103-eng-datasheet-14103419.pdf?src-supplier=Distrelec, ComponentLink8URL=https://datasheet.ciiva.com/14103/4257103-eng-datasheet-14103419.pdf?src-supplier=Distrelec, ComponentLink9Description=https://datasheet.ciiva.com/48712/001088422-da-01-en-wr-com-mini-mini-usb-typ-b-65100516121-48712668.pdf?src-supplier=Conrad, ComponentLink9URL=https://datasheet.ciiva.com/48712/001088422-da-01-en-wr-com-mini-mini-usb-typ-b-65100516121-48712668.pdf?src-supplier=Conrad, Connector Type=USB,Socket, Contact Material="Copper Alloy", Contact Plating=Gold, Gender=Receptacle, Lead Free="Lead Free", Length=7.7mm, Manufacturer Part Number=65100516121, Mating Cycles=1500, Mount="Surface Mount,Horizontal", Number of Contacts=5, Number of Ports=1, Number of Positions=5, Orientation="Right Angle", Packaging="Tape and Reel", Pricing 1="1=1.32000, 10=1.16500, 50=1.09800, 100=0.98600, 250=0.89600 (USD)", REACH SVHC=Unknown, RoHS=Yes, Stock 1=2378, Supplier 1=Digi-Key, Termination=Solder, USB Standard="USB 2.0", Width=9.25mm, Working Voltage=30V
R1 R2 R3 R4 R5 R6 R7: library part RMCF0402FT1K00, "RES 1K OHM 1% 1/16W 0402", Case Code (Imperial)=0402, Case Code (Metric)=1005, Manufacturer="Stackpole Electronics", Max Operating Temperature=155°C, Max Power Dissipation=63mW, Min Operating Temperature=-55°C, Resistance=1kR, Resistor Type="Thick Film", Supplier Part Number 1=RMCF0402FT1K00CT-ND, Temperature Coefficient=100ppm/°C, Tolerance=1%, Case/Package=0402, Category="Chip SMD Resistors", ComponentLink1Description=https://datasheet.ciiva.com/15193/getdatasheetpartid-365385-15193418.pdf?src-supplier=Verical, ComponentLink1URL=https://datasheet.ciiva.com/15193/getdatasheetpartid-365385-15193418.pdf?src-supplier=Verical, ComponentLink2Description=https://datasheet.ciiva.com/24336/sei-rmcp-24336266.pdf?src-supplier=Onlinecomponents.com, ComponentLink2URL=https://datasheet.ciiva.com/24336/sei-rmcp-24336266.pdf?src-supplier=Onlinecomponents.com, Contact Plating=Tin,Matte, Depth=0.5mm, Features="Automotive AEC-Q200", Height=0.016inch, Lead Free="Lead Free", Length=1mm, Manufacturer Part Number=RMCF0402FT1K00, Military Standard=Not, Mount="Surface Mount", Number of Terminations=2, Packaging="Tape and Reel", Power Rating=63mW, Pricing 1="1=0.10000, 10=0.01300, 100=0.00530, 1000=0.00239, 2500=0.00207, 5000=0.00171 (USD)", Radiation Hardening=No, RoHS=Yes, Stock 1=290118, Supplier 1=Digi-Key, Width=0.02inch
RED1 RED2: library part 150040RS73240, "LED RED CLEAR 0402 SMD", Case Code (Imperial)=0402, Case Code (Metric)=1005, Color=Red, Forward Voltage=2V, Lens Color=Colorless, Manufacturer="Wurth Electronics", Supplier Part Number 1=732-11991-1-ND, Test Current=20mA, Case/Package=0402, Category=LEDs, ComponentLink1Description=http://www.farnell.com/datasheets/2621636.pdf?src-supplier=Farnell, ComponentLink1URL=http://www.farnell.com/datasheets/2621636.pdf?src-supplier=Farnell, ComponentLink2Description=https://katalog.we-online.de/pbs/datasheet/150040RS73240.pdf?src-supplier=Digi-Key, ComponentLink2URL=https://katalog.we-online.de/pbs/datasheet/150040RS73240.pdf?src-supplier=Digi-Key, ComponentLink3Description=http://www.farnell.com/datasheets/2621636.pdf?src-supplier=Element14, ComponentLink3URL=http://www.farnell.com/datasheets/2621636.pdf?src-supplier=Element14, ComponentLink4Description=http://www.farnell.com/datasheets/2621636.pdf?src-supplier=Newark, ComponentLink4URL=http://www.farnell.com/datasheets/2621636.pdf?src-supplier=Newark, Dominant Wavelength=625nm, Height=0.5mm, Length=1mm, Lens Size=0.5mm, Lens Style=Flat, Lens Transparency=Clear, Luminous Intensity=100mcd, Manufacturer Part Number=150040RS73240, Mount="Surface Mount", Packaging="Tape and Reel", Pricing 1="1=0.30000, 10=0.25400, 100=0.22900, 500=0.20400, 1000=0.17900 (USD)", RoHS=No, Stock 1=7760, Supplier 1=Digi-Key, Viewing Angle=120°, Width=0.5mm
SW1: library part 434121043836, "SWITCH TACTILE SPST-NO 0.05A 12V", Manufacturer="Wurth Electronics", Operating Force=360gf, Supplier Part Number 1=732-7047-1-ND, Actuator Material="Polymer,Liquid Crystal Polymer", Category="Tactile Switches", ComponentLink1Description=http://katalog.we-online.de/em/datasheet/434121043836.pdf?src-supplier=Digi-Key, ComponentLink1URL=http://katalog.we-online.de/em/datasheet/434121043836.pdf?src-supplier=Digi-Key, ComponentLink2Description=https://katalog.we-online.de/em/datasheet/434121043836.pdf?src-supplier=Digi-Key, ComponentLink2URL=https://katalog.we-online.de/em/datasheet/434121043836.pdf?src-supplier=Digi-Key, Illumination Type=Non-Illuminated, Manufacturer Part Number=434121043836, Mechanical Life=50000Cycles, Pricing 1="1=0.39000, 900=0.31320 (USD)", RoHS=Yes, Stock 1=4117, Supplier 1=Digi-Key, Switch Function=Off-Mom, Switch Travel=0.25mm, Termination=SMD/SMT, Throw Configuration=SPST
U1: library part UA78L05ACPK, "TEXAS INSTRUMENTS - UA78L05ACPK - LINEAR VOLT REG, 5V, 0.1A, SOT-89-3", Case/Package=SOT-89, Dropout Voltage=1.7V, Manufacturer="Texas Instruments", Max Input Voltage=20V, Max Operating Temperature=125°C, Max Output Current=100mA, Min Input Voltage=7V, Min Operating Temperature=-40°C, Nominal Output Voltage=5V, Output Voltage Accuracy=5%, Package Quantity=1, Power Supply Rejection Ratio (PSRR)=49dB, Quiescent Current=3.8mA, Supplier Part Number 1=296-11118-1-ND, Accuracy=5%, Category="Voltage Regulators - Linear", ComponentLink1Description=https://datasheet.ciiva.com/15110/getdatasheetpartid-40762-15110962.pdf?src-supplier=Verical, ComponentLink1URL=https://datasheet.ciiva.com/15110/getdatasheetpartid-40762-15110962.pdf?src-supplier=Verical, ComponentLink2Description=https://datasheet.ciiva.com/34301/764220-34301498.pdf?src-supplier=Jameco, ComponentLink2URL=https://datasheet.ciiva.com/34301/764220-34301498.pdf?src-supplier=Jameco, ComponentLink3Description=https://datasheet.ciiva.com/2041/ua78l05-2041782.pdf?src-supplier=Digi-Key, ComponentLink3URL=https://datasheet.ciiva.com/2041/ua78l05-2041782.pdf?src-supplier=Digi-Key, ComponentLink4Description=https://datasheet.ciiva.com/3224/ua78l15a-3224599.pdf?src-supplier=Avnet, ComponentLink4URL=https://datasheet.ciiva.com/3224/ua78l15a-3224599.pdf?src-supplier=Avnet, ComponentLink5Description=https://datasheet.ciiva.com/2041/ua78l05-2041784.pdf?src-supplier=Digi-Key, ComponentLink5URL=https://datasheet.ciiva.com/2041/ua78l05-2041784.pdf?src-supplier=Digi-Key, ComponentLink6Description=https://datasheet.ciiva.com/3224/ua78l15a-3224600.pdf?src-supplier=Avnet, ComponentLink6URL=https://datasheet.ciiva.com/3224/ua78l15a-3224600.pdf?src-supplier=Avnet, ComponentLink7Description=https://datasheet.ciiva.com/46429/1794486-46429899.pdf?src-supplier=Element14, ComponentLink7URL=https://datasheet.ciiva.com/46429/1794486-46429899.pdf?src-supplier=Element14, ComponentLink8Description=https://datasheet.ciiva.com/46429/1848990-46429886.pdf?src-supplier=Element14, ComponentLink8URL=https://datasheet.ciiva.com/46429/1848990-46429886.pdf?src-supplier=Element14, ComponentLink9Description=https://datasheet.ciiva.com/26167/ua78l12a-26167574.pdf?src-supplier=Avnet+Europe, ComponentLink9URL=https://datasheet.ciiva.com/26167/ua78l12a-26167574.pdf?src-supplier=Avnet+Europe, ComponentLink10Description=https://datasheet.ciiva.com/2041/ua78l05-2041783.pdf?src-supplier=Digi-Key, ComponentLink10URL=https://datasheet.ciiva.com/2041/ua78l05-2041783.pdf?src-supplier=Digi-Key, Contact Plating=Tin,Matte, Lead Free="Lead Free", Manufacturer Part Number=UA78L05ACPK, Mount="Surface Mount", Number of Outputs=1, Number of Pins=3, Number of Regulators=1, Output Current=100mA, Output Type=Fixed, Output Voltage=5V, Packaging="Tape and Reel", Polarity=Positive, Pricing 1="1=0.41000, 10=0.32900, 25=0.30120, 100=0.20300, 250=0.16800, 500=0.15400 (USD)", Radiation Hardening=No, REACH SVHC="No SVHC", RoHS=Yes, Stock 1=54244, Supplier 1=Digi-Key, Weight=0.004603oz
U2: "FTDI - FT232RL-REEL - Interface Bridges, USB to UART, 1.8 V, 5.25 V, SSOP, 28 Pins, -40 °C", Case/Package=SSOP, Manufacturer=FTDI, Max Operating Temperature=85°C, Max Supply Voltage=5.25V, Min Operating Temperature=-40°C, Min Supply Voltage=3.3V, Operating Supply Current=15mA, Package Quantity=2000, Supplier Part Number 1=768-1007-1-ND, Voltage=5V, Category="Interface ICs", ComponentLink1Description=https://datasheet.ciiva.com/34304/2161019-34304054.pdf?src-supplier=Jameco, ComponentLink1URL=https://datasheet.ciiva.com/34304/2161019-34304054.pdf?src-supplier=Jameco, ComponentLink2Description=https://datasheet.ciiva.com/4787/ds-ft232r-11534-4787658.pdf?src-supplier=Mouser, ComponentLink2URL=https://datasheet.ciiva.com/4787/ds-ft232r-11534-4787658.pdf?src-supplier=Mouser, ComponentLink3Description=https://datasheet.ciiva.com/26841/ft232rl-reel-26841080.pdf?src-supplier=IIIC, ComponentLink3URL=https://datasheet.ciiva.com/26841/ft232rl-reel-26841080.pdf?src-supplier=IIIC, ComponentLink4Description=https://datasheet.ciiva.com/1787/ds-ft232r-1787047.pdf?src-supplier=Digi-Key, ComponentLink4URL=https://datasheet.ciiva.com/1787/ds-ft232r-1787047.pdf?src-supplier=Digi-Key, ComponentLink5Description=https://datasheet.ciiva.com/1787/ds-ft232r-1787048.pdf?src-supplier=Digi-Key, ComponentLink5URL=https://datasheet.ciiva.com/1787/ds-ft232r-1787048.pdf?src-supplier=Digi-Key, ComponentLink6Description=https://datasheet.ciiva.com/1787/ds-ft232r-1787049.pdf?src-supplier=Digi-Key, ComponentLink6URL=https://datasheet.ciiva.com/1787/ds-ft232r-1787049.pdf?src-supplier=Digi-Key, ComponentLink7Description=https://datasheet.ciiva.com/15150/getdatasheetpartid-643207-15150506.pdf?src-supplier=Verical, ComponentLink7URL=https://datasheet.ciiva.com/15150/getdatasheetpartid-643207-15150506.pdf?src-supplier=Verical, ComponentLink8Description=https://datasheet.ciiva.com/16200/ds-ft232r-16200652.pdf?src-supplier=Future+Electronics, ComponentLink8URL=https://datasheet.ciiva.com/16200/ds-ft232r-16200652.pdf?src-supplier=Future+Electronics, Data Rate=12Mbps, Height=1.75mm, Interface=UART,RS-232,RS-422,RS-485, Lead Free="Lead Free", Length=10.2mm, Manufacturer Part Number=FT232RL-REEL, Mount="Surface Mount", Number of Channels=1, Number of Pins=28, Number of Transceivers=1, Packaging="Tape and Reel", Pricing 1="1=4.50000, 10=4.05000, 50=3.85000, 100=3.65000, 250=3.25000, 500=2.85002, 1000=2.65000 (USD)", Radiation Hardening=No, REACH SVHC="No SVHC", RoHS=Yes, Stock 1=118934, Supplier 1=Digi-Key, Weight=0.080001oz, Width=5.3mm

## Free pads (board coordinates)
  round 0 hole 1.5: 41(8.75,18.75) 42(-8.75,18.75) 43(-8.75,-22.1) 44(8.75,-22.1)

## Via types
v1: diameter 0.6, hole 0.3, Top Layer to Bottom Layer, 90 vias

## Nets (pads, with @x,y where several pads share a name; then routed paths per layer and width w, separated by ;. In a path a pad name is that pad's centre, name@x,y a point inside that pad or via, vN(x,y) a via of type N, cw(c..) or ccw(c..) an arc to the next point about the centre after c; other vN are vias at no path point)
3V3: H3.2 U2.17 | length 14.6
  Top Layer w0.3: v1(-0.9,14.3) v1(0.9,14.3)
  Bottom Layer w0.3: H3.2 -7.84,14.3 v1(-0.9,14.3) ; v1(0.9,14.3) 0.957,14.243 0.957,13.094 2.226,11.825 3.4,11.825 U2.17
+5V: A1.4 A1.6 A1.18 C6.2 C7.1 C8.2 C9.2 C10.2 D1.1 H1.2 H3.12 R3.2 R4.2 R5.1 R6.2 U1.3 U2.4 U2.20 | length 84.4
  Top Layer w0.3: H1.2 -2.54,-16.419 -1.9,-15.779 -1.9,-14.2 R4.2 -0.9,-14 0.249,-14 0.6,-13.648 0.6,-13.551 0.951,-13.2 1.674,-13.2 1.85,-13.024 1.85,-12.801 2.251,-12.4 2.749,-12.4 3.1,-12.751 3.1,-13.6 R3.2 ; v1(-2.5,5.2) -2.301,5.2 A1.18 -1.001,3.9 -0.151,3.9 0.237,3.511 0.237,1.514 ; v1(-0.908,7.09) -0.834,7.09 0.276,8.2 v1(0.3,8.2) ; v1(-0.8,-3.5) -0.144,-2.844 2.208,-2.844 ; A1.4 2.279,-2.774 2.279,-0.527 0.237,1.514 ; A1.6 3.944,-2.192 0.237,1.514
  Bottom Layer w0.3: C9.2 C8.2 -4.95,-21.6 -4.85,-21.6 -4.636,-21.386 -4.612,-21.386 -4.4,-21.174 -4.4,-19.65 ; U2.4 -3.4,6.325 -2.876,6.325 -2.5,5.949 v1(-2.5,5.2) -2.5,5.4 -0.908,6.992 v1(-0.908,7.09) ; H1.2 -3.46,-19.65 -4.4,-19.65 ; v1(-0.8,-3.5) -0.743,-3.557 -0.743,-4.032 -0.424,-4.35 -0.4,-4.35 R6.2 0,-6.774 -0.826,-7.6 -0.85,-7.6 -1.1,-7.85 -1.2,-7.85 C6.2 -1.35,-7.9 -1.52,-8.07 U1.3 -6.74,-10 H3.12 -7.545,-13.515 -7.545,-17.979 -6.424,-19.1 -6.3,-19.1 C10.2 -4.9,-19.15 -4.4,-19.65 ; v1(0.3,8.2) 1.116,9.016 1.791,9.016 2.55,9.775 ; D1.1 0.3,12.025 2.55,9.775 ; U2.20 2.55,9.775
A0: A1.23 H3.4 | length 8.3
  Top Layer w0.3: H3.4 -6.95,6.21 -6.95,4.192 A1.23
A1: A1.24 H3.5 | length 6.1
  Top Layer w0.3: H3.5 -8.9,5.506 -5.802,2.408 -5.802,1.913 A1.24
A2: A1.25 H3.6 | length 5.7
  Top Layer w0.3: H3.6 -4.996,-0.824 A1.25@-5.091,-0.919
A3: A1.26 H3.7 | length 5.5
  Top Layer w0.3: H3.7 -8.666,0.306 -7.731,0.306 -5.535,-1.891 -4.932,-1.891 -4.667,-1.626 A1.26
A4: A1.27 H3.8 | length 5.2
  Top Layer w0.3: H3.8 -6.696,-2 -6.239,-2.457 -4.366,-2.457 -4.101,-2.192 A1.27
A5: A1.28 H3.9 | length 6.2
  Top Layer w0.3: H3.9 -5.176,-4.54 A1.28
A6: A1.19 H3.10 | length 14.6
  Top Layer w0.3: A1.19 -1.347,3.115 -1.347,2.547 v1(-1.3,2.5)
  Bottom Layer w0.3: H3.10 -8.831,-7.08 -6,-4.249 -6,-2.464 -2.542,0.994 -2.542,1.257 v1(-1.3,2.5)
A7: A1.22 H3.11 | length 17.8
  Top Layer w0.3: A1.22 -3.141,1.515 -3.141,1.266 v1(-3.165,1.242)
  Bottom Layer w0.3: H3.11 -9.962,-8.558 -9.962,-1.56 -8.924,-0.522 -4.907,-0.522 -3.165,1.22 v1(-3.165,1.242)
AREF: A1.20 C1.1 H3.3 | length 15
  Top Layer w0.3: H3.3 -5.836,7.636 -5.836,6.472 A1.20 -2.758,3.337 -2.115,2.694 -2.115,1.366 -1.649,0.9 v1(0,0.9)
  Bottom Layer w0.3: C1.1 v1(0,0.9)
D0/RX: H2.2 R2.1 U2.1 | length 29.1
  Bottom Layer w0.3: U2.1 -2.427,4.475 -0.65,2.698 -0.65,0.076 -1.076,-0.35 -1.1,-0.35 R2.1 -1.25,-1.312 1.338,-3.9 3.249,-3.9 3.999,-4.65 4.035,-4.65 5.55,-6.165 5.55,-7.773 6.7,-8.923 6.7,-10.137 6.7,-11.351 7.05,-11.701 7.05,-15.31 H2.2
D1/TX: H2.1 R1.2 U2.5 | length 40.4
  Top Layer w0.3: v1(-1.8,7.1) -1.8,7.077 -0.423,5.7 v1(-0.4,5.7)
  Bottom Layer w0.3: U2.5 -1.825,7.075 v1(-1.8,7.1) ; v1(-0.4,5.7) 1.1,4.2 1.1,0.65 R1.2 1.85,1.1 4.267,1.1 4.467,0.9 6.936,0.9 7.718,1.682 9.34,1.682 9.962,1.06 9.962,-17.6 9.3,-18.262 9.3,-18.969 8.9,-19.369 H2.1
D2: A1.32 H2.5 | length 14.5
  Top Layer w0.3: A1.32 -0.955,-4.844 -0.389,-4.844 0.3,-5.533 0.3,-6.349 1.251,-7.3 v1(2.1,-7.3) ; v1(6.1,-9.2) 6.181,-9.2 6.431,-9.45 8.81,-9.45 H2.5
  Bottom Layer w0.3: v1(2.1,-7.3) 2,-7.4 2,-8.649 3.501,-10.15 4.426,-10.15 4.58,-10.304 5.156,-10.304 5.599,-9.861 5.599,-9.76 6.1,-9.259 v1(6.1,-9.2)
D3: A1.1 H2.6 | length 9.2
  Top Layer w0.3: A1.1 1.131,-5.4 1.949,-5.4 2.7,-6.151 2.7,-6.749 3.051,-7.1 8.8,-7.1 H2.6
D4: A1.2 H2.7 | length 7.9
  Top Layer w0.3: A1.2 2.342,-5.1 4.018,-5.1 4.818,-4.3 6.151,-4.3 6.311,-4.46 H2.7
D5: A1.9 H2.8 | length 5.1
  Top Layer w0.3: A1.9 5.031,1.128 5.172,1.128 7.986,-1.686 8.666,-1.686 H2.8
D6: A1.10 H2.9 | length 5.2
  Top Layer w0.3: A1.10 4.603,1.69 5.013,2.1 7.42,2.1 H2.9
D7: A1.11 H2.10 | length 5.4
  Top Layer w0.3: A1.11 4.74,3.1 8.84,3.1 H2.10
D8: A1.12 H2.11 | length 6.8
  Top Layer w0.3: A1.12 3.507,2.998 3.649,2.998 6.351,5.7 H2.11
D9: A1.13 H2.12 | length 8.1
  Top Layer w0.3: A1.13 7.618,8.24 H2.12
D10: A1.14 H2.13 | length 9.6
  Top Layer w0.3: A1.14@2.136,4.016 H2.13
D11/MOSI: A1.15 H1.4 H2.14 | length 60.2
  Top Layer w0.3: v1(-1.273,1.627) -0.4,2.5 v1(-0.4,3.3) ; v1(-0.374,6.5) -0.351,6.5 0.237,5.911 0.237,4.783 0.767,4.254 1.015,4.254 1.103,4.342 1.457,4.342 6.776,9.661 6.776,11.196 H2.14
  Bottom Layer w0.3: v1(-1.273,1.627) -5.55,-2.65 -5.55,-7.772 -8.46,-10.682 -8.924,-10.682 -9.962,-11.72 -9.962,-20.22 -9.132,-21.05 -8.315,-21.05 -7.033,-22.332 -2.1,-22.332 -1.167,-21.399 -1.167,-19.897 H1.4 ; v1(-0.4,3.3) -1,3.9 -1,5.949 -0.449,6.5 v1(-0.374,6.5)
D12/MISO: A1.16 H1.1 H2.15 | length 83.2
  Top Layer w0.3: v1(-10.2,2.7) -10.2,0.338 -9.241,-0.621 -8.079,-0.621 v1(-7.3,-1.4) ; v1(-9.8,17.3) -6.924,17.3 -5.974,18.25 6.51,18.25 H2.15 6.326,13.286 6.326,10.001 3.991,7.666 3.65,7.666 A1.16 ; v1(-8,-5.4) -7.838,-5.562 -7.838,-15.14 -8.668,-15.97 -9.132,-15.97 -9.962,-16.8 -9.962,-20.22 -9.132,-21.05 -2.76,-21.05 H1.1
  Bottom Layer w0.3: v1(-10.2,2.7) -10.2,16.819 -9.8,17.219 v1(-9.8,17.3) ; v1(-8,-5.4) -8,-5.2 -7.3,-4.5 v1(-7.3,-1.4)
D13/SCK: A1.17 H1.3 H3.1 R7.2 | length 58.8
  Top Layer w0.3: H3.1 -6.243,13.123 -6.243,9.968 -1.542,5.268 -1.237,5.268 A1.17 -0.995,5.091 -0.444,4.541 v1(-0.378,4.541) ; v1(-2.749,-13.051) -2.806,-13.109 -2.806,-13.41 -2.996,-13.6 R7.2 -3.35,-13.95 -3.089,-13.95 -2.65,-14.389 -2.65,-15.893 -3.1,-16.343 -3.1,-16.754 -3.602,-17.256 -3.602,-19.17 -2.669,-20.103 -1.167,-20.103 H1.3 ; v1(6.3,-11.8) 6.5,-11.8 v1(7.3,-11)
  Bottom Layer w0.3: v1(-2.749,-13.051) -2.7,-13.003 -2.7,-12.6 -1.6,-11.5 4.811,-11.5 5.111,-11.8 v1(6.3,-11.8) ; v1(-0.378,4.541) 0.6,3.562 0.6,-1.749 1.851,-3 4.049,-3 4.5,-3.451 4.5,-3.964 4.55,-4.014 4.55,-4.429 6.788,-6.667 6.788,-8.374 7.3,-8.886 v1(7.3,-11)
GND: A1.3 A1.5 A1.21 C1.2 C2.1 C3.2 C5.1 C6.1 C7.2 C8.1 C9.1 C10.1 C11.1 C12.1 H1.6 H2.3 H3.14 M1.5 RED1.1 RED2.1 SW1.1 U1.2 U2.7 U2.18 U2.21 U2.25 U2.26 | length 84.6
  Top Layer w0.3: v1(-6.5,7.3) -6.5,6.005 -2.565,2.07 -2.565,1.165 v1(-0.5,-0.9) ; v1(-5.5,-18.4) -5.5,-18.481 -5.3,-18.681 v1(-5.3,-20.1) ; v1(-4.8,-17.1) -4.8,-16.076 -4.124,-15.4 -4.1,-15.4 RED2.1 ; v1(-3.5,-10.6) -3.15,-10.25 -3.15,-9.55 -2.3,-8.7 v1(-0.6,-8.7) ; v1(-3,-11.9) -0.65,-11.9 v1(0,-12.55) ; RED1.1 -1.049,-15 0.251,-16.3 v1(0.4,-16.3) 0.481,-16.3 0.781,-16.6 1.674,-16.6 2.5,-15.774 v1(2.5,-13) ; v1(-1.1,-6.3) 0.143,-7.543 0.143,-7.743 v1(0.2,-7.8) ; M1.5 1.75,10.9 1.85,11 v1(2.5,11) ; A1.3 A1.3@2.44,-4.066 ; v1(3,-4.5) 2.874,-4.5 A1.3@2.44,-4.066 ; A1.5 3.394,-2.899 3.659,-3.164 3.659,-3.624 3.129,-4.154 2.881,-4.154 2.793,-4.066 A1.3@2.44,-4.066 ; v1(5,-20) 7.273,-17.727 7.273,-16.247 H2.3
  Bottom Layer w0.3: v1(-6.5,7.3) -5.425,8.375 U2.7 ; C10.1 -6.225,-18.375 -5.525,-18.375 v1(-5.5,-18.4) ; v1(-5.3,-20.1) -5.3,-20.181 -5.15,-20.331 -5.15,-20.8 -5.1,-20.85 C8.1 ; v1(-4.8,-17.1) -0.151,-17.1 0.343,-16.606 ; v1(-3.5,-10.6) -4.249,-10.6 -5.376,-11.727 -5.376,-12.224 -5.024,-12.576 -3.676,-12.576 v1(-3,-11.9) ; C6.1 -1.25,-6.531 -1.1,-6.381 v1(-1.1,-6.3) ; v1(-0.5,-0.9) -0.443,-0.843 -0.443,-0.743 -0.1,-0.4 C1.2 0,-1.785 1.665,-3.45 3.569,-3.45 3.819,-3.7 v1(3.9,-3.7) ; U1.2 -0.37,-9.65 -0.37,-9.011 -0.6,-8.781 -0.6,-8.65 0.2,-7.85 v1(0.2,-7.8) ; v1(0,-12.55) 1.969,-12.55 2.419,-13 v1(2.5,-13) ; C5.1 1.349,-7.1 1.399,-7.05 1.399,-6.45 1.5,-6.349 1.5,-6 v1(3,-4.5) 3.049,-4.5 3.649,-5.1 3.849,-5.1 5,-6.251 C2.1 ; v1(2.5,11) 2.537,11.037 3.463,11.037 U2.18 ; H1.6 3.81,-20 v1(5,-20) C11.1
NetA1_7: A1.7 C2.2 CR1.1 | length 27.4
  Top Layer w0.3: v1(-5.8,-13.3) -5.8,-12.151 -4.911,-11.262 4.062,-11.262 4.894,-10.43 4.894,-9.717 v1(4.907,-9.704) ; v1(3.6,-5.7) 5,-5.7 5.8,-4.9 v1(5.87,-4.9) ; A1.7 5.5,-2.601 v1(5.5,-3.4)
  Bottom Layer w0.3: v1(-5.8,-13.3) -5.8,-14.15 -4.95,-15 CR1.1 ; v1(3.6,-5.7) 4.3,-6.4 4.3,-7.351 4.849,-7.9 C2.2 4.976,-7.924 4.976,-9.635 v1(4.907,-9.704) ; v1(5.5,-3.4) 5.5,-4.527 5.8,-4.827 5.8,-4.83 v1(5.87,-4.9)
NetA1_8: A1.8 C3.1 CR1.2 | length 39.9